# Altium PCB V7.PcbDoc
Units mil, origin at the board's own origin, x right, y up, seen from the top; angles counter-clockwise.
Board outline 1574.8 x 1968.5 mil, 2 copper layers (Top Layer, Bottom Layer), stack 12.8 mil thick; 85 components, 54 nets, 278 pads, 238 vias.
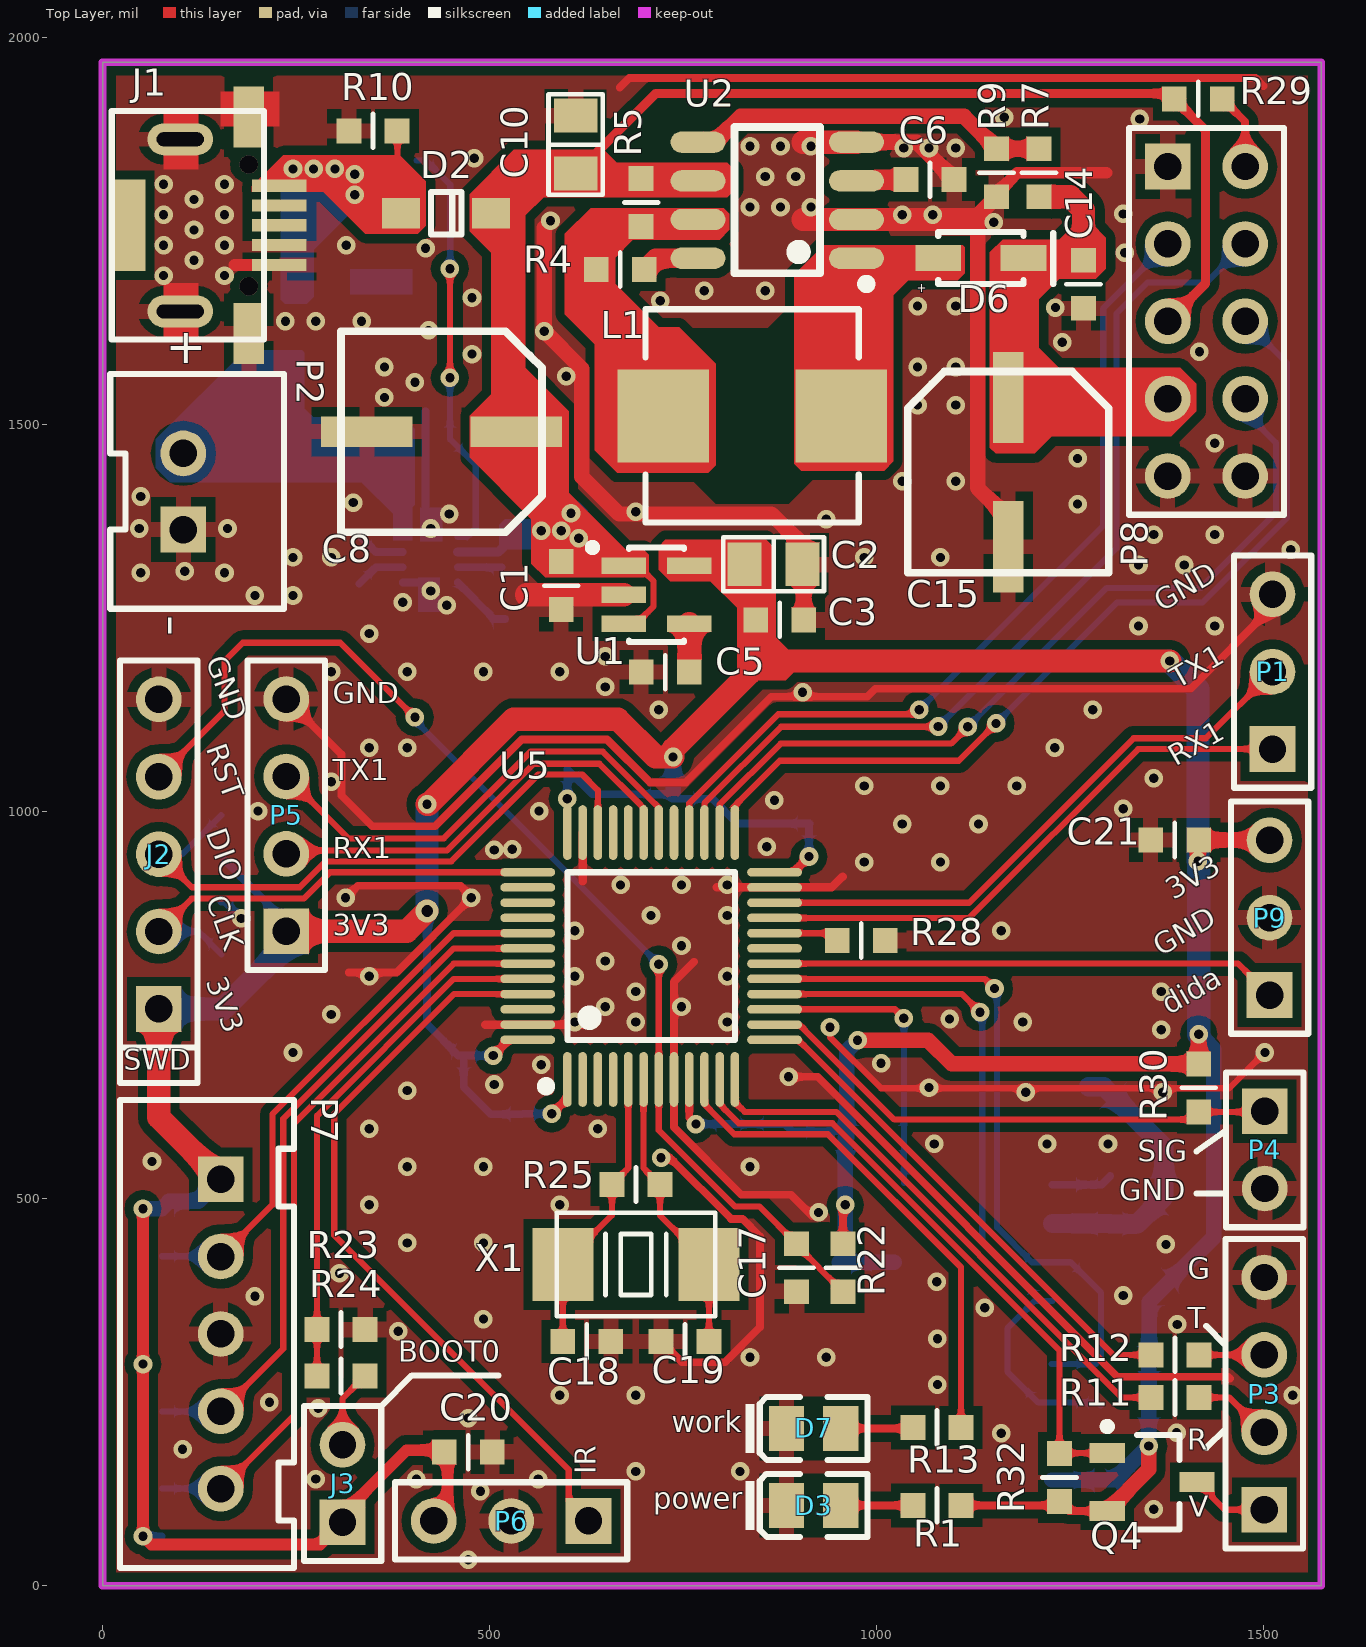
[diagram p0: Top Layer view]
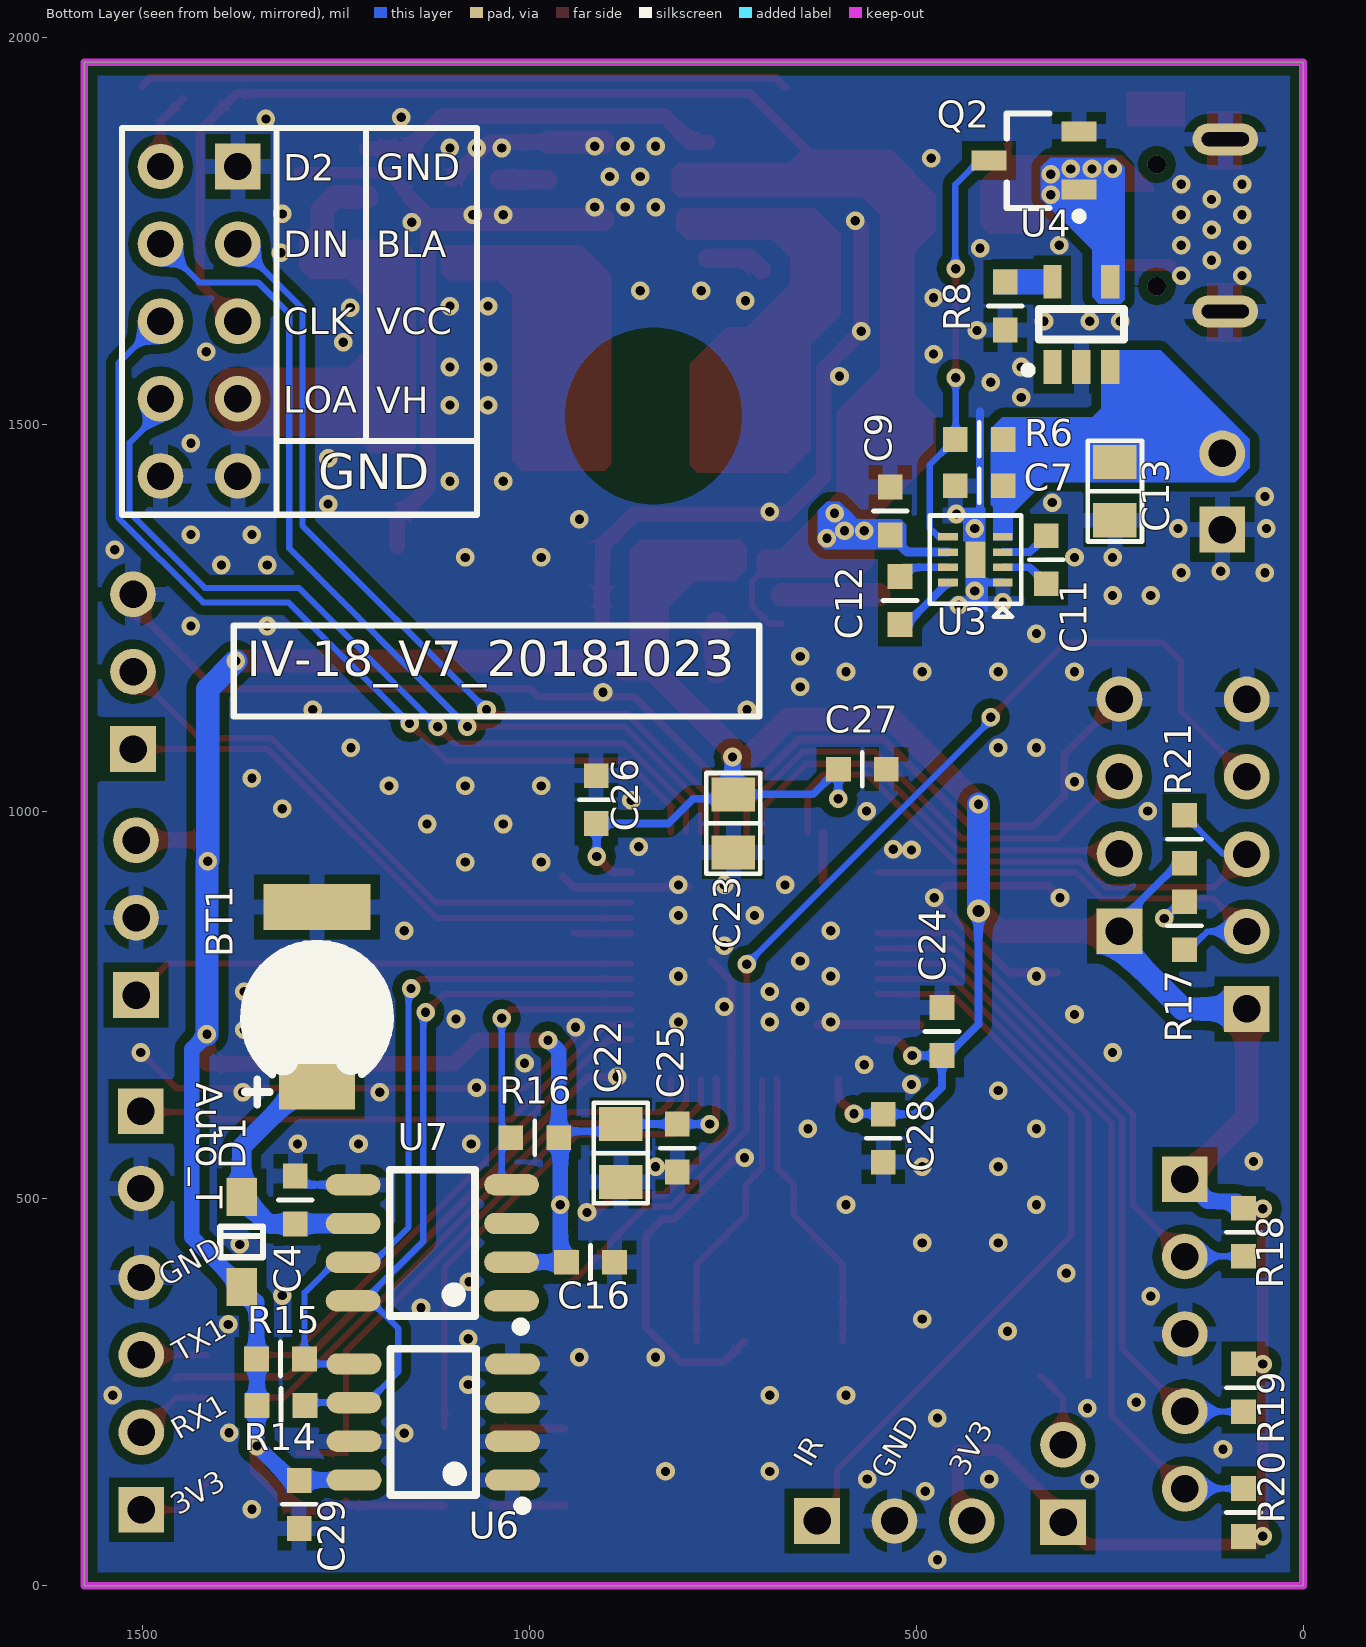
[diagram p1: Bottom Layer view, seen from below]

## Layer stack, top to bottom
Top Solder: solder mask 0.4, Solder Resist, Dk 3.5
Top Layer: signal copper 1.4
Dielectric1: core 10, FR-4, Dk 4.2
Bottom Layer: signal copper 1.4
Bottom Solder: solder mask 0.4, Solder Resist, Dk 3.5

## Board outline
0,0 0,1968.5 1574.8,1968.5 1574.8,0

## Design rules (kind name [scope] priority, off if disabled: settings)
Clearance Clearance_RF [InNet('NetC42_2')or InNet('NetC41_2')] p1: gap=7 ignorepadtopadclearanceinfootprint=FALSE
Clearance Clearance_Free [HasPad('Free-0') or HasPad('Free-1') or HasPad('Free-2') or HasPad('Free-3') or HasPad('Free-4') or HasPad('Free-5')] p2: gap=39.37 ignorepadtopadclearanceinfootprint=FALSE
Clearance Clearance_PWR [InNet('VDD5')] p3: gap=12 ignorepadtopadclearanceinfootprint=FALSE
Clearance Clearance_Poly [InPolygon] p4: gap=12 ignorepadtopadclearanceinfootprint=FALSE
Clearance [All] p5: gap=6 ignorepadtopadclearanceinfootprint=FALSE
ComponentClearance [All] p1 off: gap=3.94 collisioncheckmode=3 verticalgap=0 showdistances=FALSE
HoleSize [All] p1: absolutevalues=TRUE maxlimit=120 minlimit=1 maxpercent=80.000 minpercent=20.000
HoleToHoleClearance [All] p1 off: gap=10 allowstackedmicrovias=TRUE
MinimumSolderMaskSliver [All] p1 off: minsoldermaskwidth=10
PolygonConnect PolygonConnect_VIA [isvia] p1: connectstyle=Direct reliefconductorwidth=10 reliefentries=4 polygonreliefangle="90 Angle" airgapwidth=10
PolygonConnect PolygonConnect_Driect [InNet('AC-LP') Or InNet('NetR11_2') Or InNet('NetPT1_3') Or InNet('NetCT1_4') Or InNet('NetH2_1') Or InNet('AC-N') Or InNet('NetH3_1')] p2: connectstyle=Direct reliefconductorwidth=10 reliefentries=4 polygonreliefangle="90 Angle" airgapwidth=10
PolygonConnect PolygonConnect_TP [InComponent('TP19') Or InComponent('TP1') Or InComponent('TP2') Or InComponent('TP5') Or InComponent('TP20') Or InComponent('TP8')] p3: connectstyle=Direct reliefconductorwidth=10 reliefentries=4 polygonreliefangle="90 Angle" airgapwidth=10
PolygonConnect [All] p4: connectstyle=Relief reliefconductorwidth=20 reliefentries=4 polygonreliefangle="90 Angle" airgapwidth=12
RoutingVias [All] p1: holewidth=12 width=24 viastyle="Through Hole" minholewidth=12 minwidth=20 maxholewidth=130 maxwidth=250
SilkToSilkClearance [All] p1 off: silktosilkclearance=10
SilkToSolderMaskClearance SilkscreenOverComponentPads [IsPad] p1 off: minsilkscreentomaskgap=10 clearancetoexposedcopper=TRUE
SolderMaskExpansion [All] p1: expansion=4
UnRoutedNet [All] p1: checkbadconnections=TRUE
Width [All] p1: maxlimit=100 minlimit=6 preferedwidth=8
23 further rules are at their usual default settings.

## Components (designator, comment, footprint, x,y, rotation, side; value= is the part's Value field where it differs from the comment)
BT1 "超级电容" SF-3R3-S104Z 1274.13,735.24 r90 bottom
C1 "1uF" C1608(CC0603) 592.52,1292.32 r270 top value=100pF
C2 "10uF" C2012(CC0805) 867.13,1319.88 r0 top value=100pF
C3 "0.1uF" C1608(CC0603) 875,1248.03 r180 top value=100pF
C4 "0.1uf" C1608(CC0603) 1302.13,498.43 r270 bottom value=100pF
C5 "1nF" C1608(CC0603) 727.03,1180.54 r0 top value=100pF
C6 "560p" C1608(CC0603) 1069.17,1816.93 r0 top value=560pF
C7 "4.7uF/0805" C1608(CC0603) 418.31,1421.26 r0 bottom value=100pF
C8 "47uF/50V" 铝电解电容6.3 437.99,1491.14 r90 top
C9 "4.7uF" C1608(CC0603) 533.46,1388.78 r90 bottom value=100pF
C10 "10uF/25V_0805" C2012(CC0805) 611.22,1862.2 r270 top value=0.1uF
C11 "1uF" C1608(CC0603) 331.8,1325.79 r90 bottom value=100pF
C12 "1uF" C1608(CC0603) 520.67,1273.13 r270 bottom value=100pF
C13 "220uF/16V" C2012(CC0805) 243.11,1414.27 r90 bottom value=0.1uF
C14 "0.1u" C1608(CC0603) 1267.45,1681.6 r90 top value=0.1uF
C15 "47uF/50V" 铝电解电容6.3 1170.28,1438.98 r180 top
C16 "0.1uF" C1608(CC0603) 920.73,418.02 r0 bottom value=100pF
C17 "1nF" C1608(CC0603) 896.66,410.94 r270 top value=100nF
C18 "22pF 5%" C1608(CC0603) 625.69,315.61 r180 top
C19 "22pF 5%" C1608(CC0603) 752.66,315.61 r0 top
C20 "100nF" C1608(CC0603) 472.44,172.61 r0 top
C21 "100nF" C1608(CC0603) 1385.34,963.58 r180 top
C22 "4.7uF/25V/0805" C2012(CC0805) 881.58,558.96 r90 bottom
C23 "4.7uF/25V/0805" C2012(CC0805) 736.22,985.14 r90 bottom
C24 "100nF" C1608(CC0603) 466.54,716.04 r90 bottom
C25 "100nF" C1608(CC0603) 808.57,565.46 r270 bottom
C26 "100nF" C1608(CC0603) 913.39,1015.75 r90 bottom
C27 "100nF" C1608(CC0603) 569.39,1055.12 r180 bottom
C28 "100nF" C1608(CC0603) 542.32,578.25 r270 bottom
C29 "0.1uF" C1608(CC0603) 1297.12,105 r270 bottom value=100pF
D1 "DSS14" LC-SOD-123F 1371.59,444.14 r270 bottom
D2 "DSS14" LC-SOD-123F 443.9,1773.62 r180 top
D3 "红灯 0805" LC-0805_LED_S1 918.86,103.75 r0 top
D6 "BAT46W" INDM2716X11N 1135,1715.55 r180 top
D7 "红灯 0805" LC-0805_LED_S1 918.86,203.16 r0 top
J1 "USB_DC" USB_DC 205.71,1757.87 r0 top
J2 "SIP6E2P54" HDR1X5 72.68,745.31 r90 top
J3 "BOOT0_CH" HDR1X2 310.04,82.09 r90 top
L1 "330uh" INDM7070X40N 839.36,1511.64 r0 top value=330uH
P1 "预留串口" HDR1X3 1511.81,1081.1 r90 top
P2 "锂电池接口" XH2.54-2A 104.33,1364.72 r90 top
P3 "GPS串口" HDR1X4 1501.07,98.23 r90 top
P4 "倾斜开关" HDR1X2 1501.81,613.19 r270 top
P5 "Burn_Port" HDR1X4 237.2,845.67 r90 top
P6 "红外接口" HDR1X3 627.92,83.66 r180 top
P7 "按键接口" XH2.54-5A 152.65,525.29 r270 top
P8 "Header 5X2" HDR2X5 1376.38,1833.86 r270 top
P9 "滴答接口" HDR1X3 1507.96,763.22 r90 top
Q2 "AO3400" LC-SOT-23-3L 347.44,1841.54 r180 bottom
Q4 "AO3401A" LC-SOT-23-3L 1356.3,133.86 r180 top
R1 "1K" C1608(CC0603) 1078.24,103.75 r180 top
R4 "150ohm" C1608(CC0603) 668.98,1700.79 r0 top
R5 "1ohm" C1608(CC0603) 695.87,1787.4 r270 top
R6 "10K" C1608(CC0603) 418.31,1481.27 r0 bottom value=4.7K
R7 "33k" C1608(CC0603) 1209.92,1825.79 r270 top
R8 "1.3K" C1608(CC0603) 384.84,1653.54 r270 bottom value=1K
R9 "1k" C1608(CC0603) 1155.18,1825.79 r90 top value=1K
R10 "100K" C1608(CC0603) 349.41,1879.92 r0 top value=4.7K
R11 "22R" C1608(CC0603) 1385.83,243.11 r180 top
R12 "22R" C1608(CC0603) 1385.83,298.23 r180 top
R13 "1K" C1608(CC0603) 1078.24,204.34 r180 top
R14 "10k" C1608(CC0603) 1320.75,232.98 r180 bottom
R15 "10k" C1608(CC0603) 1321.23,292.99 r180 bottom
R16 "10k" C1608(CC0603) 992.62,578.74 r0 bottom
R17 "51K" C1608(CC0603) 153.24,852.65 r270 bottom
R18 "10k" C1608(CC0603) 76.86,456.68 r270 bottom
R19 "10k" C1608(CC0603) 76.86,255.89 r270 bottom
R20 "10k" C1608(CC0603) 76.86,94.48 r90 bottom
R21 "51K" C1608(CC0603) 153.24,964.66 r90 bottom
R22 "100R" C1608(CC0603) 956.67,410.94 r90 top value=100K
R23 "47K" C1608(CC0603) 308.07,331.04 r180 top
R24 "2.2K" C1608(CC0603) 308.07,271.03 r0 top
R25 "1M" C1608(CC0603) 689.17,518.37 r0 top
R28 "100R" C1608(CC0603) 980.32,833.66 r180 top value=10K
R29 "20ohm" C1608(CC0603) 1415.84,1921.26 r0 top value=1K
R30 "10k" C1608(CC0603) 1416.34,643.2 r270 top
R32 "100k" C1608(CC0603) 1236.63,139.76 r270 top value=1K
U1 "AME8861AEEV330Z" SOT23-5 755.71,1305.51 r270 top
U2 "MC33063A" LC-SOP-8_150mil 871.79,1790.35 r90 top
U3 "AW3632DNR" DFN_8L 423.34,1325.79 r0 bottom
U4 "LTC4054" LC-SOT-23-5 286.42,1629.92 r270 bottom
U5 "STM32F103C8T6" LC-LQFP-48_7x7x05P 708.86,813.65 r0 top locked
U6 "24CXX" LC-SOP-8_150mil 1123.9,211.55 r90 bottom
U7 "DS3231MZ+TRL" LC-SOIC-8_150mil 1125.05,443.02 r90 bottom
X1 "8MHz" XTAL-5032 689.17,415.02 r0 top

## Footprints (in the part's own frame and the unit in brackets; to place one, negate y for a bottom-side part, rotate by r counter-clockwise, add the part's x,y. Pads: shape width x height; smd on the part's side, far side on the other; paste and mask are expansions set on the pad)
C1608(CC0603) [mil]
  rect 32x32 smd: 1(-31,0) 2(31,0)
  silkscreen extent 0,-22 0,22
C2012(CC0805) [mil]
  rect 44x56 smd: 1(-37.5,0) 2(37.5,0)
  silkscreen extent -65,-35 65,35
DFN_8L [mm] "2X2mm"
  rect 0.65x0.25 smd: 1(-0.9,0.75) 2(-0.9,0.25) 3(-0.9,-0.25) 4(-0.9,-0.75) 5(0.9,-0.75) 6(0.9,-0.25) 7(0.9,0.25) 8(0.9,0.75)
  rect 0.65x1.2 smd: 9(0,0)
  silkscreen extent -1.5,-1.45 1.5,1.88
HDR1X2 [mm] "Connector; Header; 2 Position"
  rect 1.5x1.5 hole 0.9: 1(0,0)
  round 1.5 hole 0.9: 2(2.54,0)
  silkscreen extent -1.27,-1.27 3.81,1.27
HDR1X3 [mm] "Connector; Header; 3 Position"
  rect 1.5x1.5 hole 0.9: 1(0,0)
  round 1.5 hole 0.9: 2(2.54,0) 3(5.08,0)
  silkscreen extent -1.27,-1.27 6.35,1.27
HDR1X4 [mm] "Connector; Header; 4 Position"
  rect 1.5x1.5 hole 0.9: 1(0,0)
  round 1.5 hole 0.9: 2(2.54,0) 3(5.08,0) 4(7.62,0)
  silkscreen extent -1.27,-1.27 8.89,1.27
HDR1X5 [mm] "Connector; Header; 5 Position"
  rect 1.5x1.5 hole 0.9: 1(0,0)
  round 1.5 hole 0.9: 2(2.54,0) 3(5.08,0) 4(7.62,0) 5(10.16,0)
  silkscreen extent -1.27,-1.27 11.43,1.27
HDR2X5 [mm] "Connector; Header; 5x2 Position"
  rect 1.5x1.5 hole 0.9: 1(0,0)
  round 1.5 hole 0.9: 2(0,2.54) 3(2.54,0) 4(2.54,2.54) 5(5.08,0) 6(5.08,2.54) 7(7.62,0) 8(7.62,2.54) 9(10.16,0) 10(10.16,2.54)
  silkscreen extent -1.27,-1.27 11.43,3.81
INDM2716X11N [mm] "Molded Inductor, 2-Leads, Body 2.70x1.60mm, IPC Medium Density"
  rect 1.5x0.85 smd: 1(-1.397,0) 2(1.397,0)
  silkscreen extent -2.37,-0.85 1.4,0.85, body extent -1.4,-0.85 1.4,0.85, height 1.1
INDM7070X40N [mm] "Molded Inductor, 2-Leads, Body 7.00x7.00mm, IPC Medium Density"
  rect 3x3.05 smd: 1(-2.921,0) 2(2.921,0)
  silkscreen extent -3.5,-3.5 3.5,3.5, body extent -3.5,-3.5 3.5,3.5, height 4
LC-0805_LED_S1 [mm]
  rect 1.16x1.47 smd: A(0.89,0) K(-0.89,0)
  silkscreen extent -2.25,-1.04 1.77,1.03, body extent -1.01,-0.62 1.01,0.62, height 1.1
LC-LQFP-48_7x7x05P [mm]
  oval 0.28x1.8 smd mask+0.051: 1(-2.75,-4.05) 2(-2.25,-4.05) 3(-1.75,-4.05) 4(-1.25,-4.05) 5(-0.75,-4.05) 6(-0.25,-4.05) 7(0.25,-4.05) 8(0.75,-4.05) 9(1.25,-4.05) 10(1.75,-4.05) 11(2.25,-4.05) 12(2.75,-4.05) 25(2.75,4.05) 26(2.25,4.05) 27(1.75,4.05) 28(1.25,4.05) 29(0.75,4.05) 30(0.25,4.05) 31(-0.25,4.05) 32(-0.75,4.05) 33(-1.25,4.05) 34(-1.75,4.05) 35(-2.25,4.05) 36(-2.75,4.05)
  oval 1.8x0.28 smd mask+0.051: 13(4.05,-2.75) 14(4.05,-2.25) 15(4.05,-1.75) 16(4.05,-1.25) 17(4.05,-0.75) 18(4.05,-0.25) 19(4.05,0.25) 20(4.05,0.75) 21(4.05,1.25) 22(4.05,1.75) 23(4.05,2.25) 24(4.05,2.75) 37(-4.05,2.75) 38(-4.05,2.25) 39(-4.05,1.75) 40(-4.05,1.25) 41(-4.05,0.75) 42(-4.05,0.25) 43(-4.05,-0.25) 44(-4.05,-0.75) 45(-4.05,-1.25) 46(-4.05,-1.75) 47(-4.05,-2.25) 48(-4.05,-2.75)
  silkscreen extent -3.6,-4.42 2.75,2.75
LC-SOD-123F [mm]
  rect 1.25x1 smd: 1(1.475,0) 2(-1.475,0)
  silkscreen extent -0.5,-0.7 0.5,0.7, body extent -1.9,-0.85 1.85,0.85, height 1.2
LC-SOIC-8_150mil [mm]
  oval 0.7x1.8 smd: 1(-1.905,-2.6) 2(-0.635,-2.6) 3(0.635,-2.6) 4(1.905,-2.6) 5(1.905,2.6) 6(0.635,2.6) 7(-0.635,2.6) 8(-1.905,2.6)
  silkscreen extent -2.9,-3.05 2.4,1.4
LC-SOP-8_150mil [mm]
  oval 0.7x1.8 smd: 1(-1.905,-2.6) 2(-0.635,-2.6) 3(0.635,-2.6) 4(1.905,-2.6) 5(1.905,2.6) 6(0.635,2.6) 7(-0.635,2.6) 8(-1.905,2.6)
  silkscreen extent -2.9,-3.08 2.4,1.4, body extent -2.5,-3.1 2.5,3.1, height 1.75
LC-SOT-23-3L [mm] "http://www.aosmd.com/res/packaging_information/SOT-23-3L.pdf"
  rect 1.15x0.65 smd: 1(1.475,-0.95) 2(1.475,0.95) 3(-1.475,0)
  silkscreen extent -0.9,-1.95 1.6,1.55, body extent -0.9,-1.55 0.9,1.55, height 1.25
LC-SOT-23-5 [mm]
  rect 1.1x0.6 smd: 1(1.4,-0.95) 2(1.4,0) 3(1.4,0.95) 4(-1.4,0.95) 5(-1.4,-0.95)
  silkscreen extent -0.5,-1.88 1.62,1.4
SF-3R3-S104Z [mm]
  rect 1.5x2.5 smd: 1(-2.3,0)
  rect 1.5x3.5 smd: 2(3.6,0)
  silkscreen extent -2.89,-2.4 2.4,2.4
SOT23-5 [mm]
  rect 0.55x1.45 smd: 1(-0.315,-2.091) 2(0.635,-2.091) 3(1.585,-2.091) 4(1.585,0.059) 5(-0.315,0.059)
  silkscreen extent -1.04,-3.24 2.19,-0.12
USB_DC [mm]
  oval 2.15x1.05 hole 0.45 slot 1.55 at 0 deg: 0(-2.675,-2.825) 0(-2.675,2.825)
  rect 1.8x0.4 smd: 0(0.575,-1.3) 1(0.575,-0.65) 2(0.575,0) 3(0.575,0.65) 4(0.575,1.3)
  rect 1x3 smd: ""(-4.325,0)
  rect 1x2 smd: ""(-0.425,-3.55) ""(-0.425,3.55)
  silkscreen extent -4.92,-3.75 0.08,3.75
XH2.54-2A [mm]
  rect 1.5x1.5 hole 0.9: 1(0,0)
  round 1.5 hole 0.9: 2(2.5,0)
  silkscreen extent -2.6,-3.3 5.1,2.4
XH2.54-5A [mm]
  rect 1.5x1.5 hole 0.9: 1(0,0)
  round 1.5 hole 0.9: 2(2.54,0) 3(5.08,0) 4(7.62,0) 5(10.16,0)
  silkscreen extent -2.6,-3.3 12.76,2.4
XTAL-5032 [mm]
  rect 2x2.4 smd: 1(-2.4,0) 2(2.4,0)
  silkscreen extent -2.6,-1.7 2.6,1.7
铝电解电容6.3 [mm]
  rect 1x3 smd: 1(0,-2.45) 2(0,2.45)
  silkscreen extent -3.3,-3.3 3.3,3.3

## Part data
BT1: library part BATTERY, "Battery"
C1 C2: library part "Cap Pol2", "Polarized Capacitor (Axial)", LatestRevisionDate=17-Jul-2002, LatestRevisionNote="Re-released for DXP Platform.", PackageDescription="Polarized Capacitor; 2 Leads", PackageReference=POLAR0.8, Published=8-Jun-2000, Publisher="Altium Limited"
C3 C4 C5 C6 C7 C9 C10 C11 C12 C13 C14 C16 C17 C18 C19 C20 C21 C22 C23 C24 C25 C26 C27 C28 C29: library part Cap, "Capacitor", LatestRevisionDate=17-Jul-2002, LatestRevisionNote="Re-released for DXP Platform.", PackageReference=RAD-0.3, Published=8-Jun-2000, Publisher="Altium Limited"
  C3 C4 C5 C7 C9 C11 C12 C16 C29: PackageDescription="Radial Cap, Thru-Hole; 2 Leads; 0.3 in Pin Spacing"
  C6 C10 C13 C14: Created=1/08/1993, PackageDescription="Radial Cap, Thru-Hole; 2 Leads; 0.3 in Pin Spacing"
C8 C15: library part "Cap Pol1", "E型", LatestRevisionDate=17-Jul-2002, LatestRevisionNote="Re-released for DXP Platform.", PackageDescription="Polarized Capacitor (Radial); 2 Leads", PackageReference=RB7.6-15, Published=8-Jun-2000, Publisher="Altium Limited"
D1 D2: library part "SOD-123 B5819W  SL", "肖特基二极管", Package=SOD-123, SuppliersPartNumber=C8598, ComponentLink1Description=供应商, ComponentLink1URL=http://www.szlcsc.com/product/details_9093.html, Supplier=LC
D3 D7: library part "0805 红灯", "发光二极管", Package=0805, SuppliersPartNumber=C2295, ComponentLink1URL=http://www.szlcsc.com/product/details_2668.html, Supplier=LC
  D3: ComponentLink1Description=供应商
  D7: ComponentLink1Description=供应商链接
D6: library part "Diode 10TQ045", "Schottky Rectifier", ComponentLink1Description="Manufacturer Link", ComponentLink1URL=http://www.irf.com/, ComponentLink2Description=Datasheet, ComponentLink2URL=http://www.irf.com/product-info/datasheets/data/10tq.pdf, DatasheetVersion=PD-2.057B, LatestRevisionDate=17-Jul-2002, LatestRevisionNote="Re-released for DXP Platform.", Note="Terminal 2 is the TAB and is electrically connected to the cathode", PackageDescription="TO, Thru-Hole, Vertical, Heatsink Mounted; 3 In-Line Leads (1 Absent); Pitch 2.54 mm", PackageReference=TO-220AC, PackageVersion=Feb-1998, Published=8-Jun-2000, Publisher="Altium Limited"
J2 P7: library part "Header 5", "Header, 5-Pin", LatestRevisionDate=17-Jul-2002, LatestRevisionNote="Re-released for DXP Platform.", Publisher="Altium Limited"
J3 P2 P4: library part "Header 2", "Header, 2-Pin", LatestRevisionDate=17-Jul-2002, LatestRevisionNote="Re-released for DXP Platform.", Publisher="Altium Limited"
L1: library part "Inductor Iron", "7*7", LatestRevisionDate=17-Jul-2002, LatestRevisionNote="Re-released for DXP Platform.", PackageDescription="Axial Device, Thru-Hole; 2 Leads; 0.9 in Pin Spacing", PackageReference=AXIAL-0.9, Published=24-Mar-1999, Publisher="Altium Limited"
P1 P6 P9: library part "Header 3", "Header, 3-Pin", LatestRevisionDate=17-Jul-2002, LatestRevisionNote="Re-released for DXP Platform.", Publisher="Altium Limited"
P3 P5: library part "Header 4", "Header, 4-Pin", LatestRevisionDate=17-Jul-2002, LatestRevisionNote="Re-released for DXP Platform.", Publisher="Altium Limited"
P8: "Header, 5-Pin, Dual row", LatestRevisionDate=17-Jul-2002, LatestRevisionNote="Re-released for DXP Platform.", Publisher="Altium Limited"
Q2: library part "AO3400A N道沟 X0YV1T SOT-23", "MOS(场效应管)", Package=SOT-23, SuppliersPartNumber=C20917, ComponentLink1Description=供应商链接, ComponentLink1URL=http://www.szlcsc.com/product/details_21629.html, Supplier=LC
Q4: library part "AO3401A P道沟 X13A15 SOT-23", "MOS(场效应管)", Package=SOT-23, SuppliersPartNumber=C15127, ComponentLink1Description=供应商链接, ComponentLink1URL=http://www.szlcsc.com/product/details_15801.html, Supplier=LC
R1 R4 R5 R6 R7 R8 R9 R10 R13 R17 R21 R22 R23 R24 R25 R28 R29 R32: library part Res2, "Resistor", LatestRevisionDate=17-Jul-2002, LatestRevisionNote="Re-released for DXP Platform.", PackageReference=AXIAL-0.4, Published=8-Jun-2000, Publisher="Altium Limited"
  R4 R5 R7 R9 R29 R32: Created=1/08/1993, PackageDescription="Axial Device, Thru-Hole; 2 Leads; 0.4 in Pin Spacing"
  R6 R8 R10: PackageDescription="Axial Device, Thru-Hole; 2 Leads; 0.4 in Pin Spacing"
R11 R12 R14 R15 R16 R18 R19 R20 R30: library part RES5
U1: library part MIC5205-3.3BM5, "MIC5205-3.3BM5"
U2: library part MC330
U5: "STM32 ARM-based 32-bit MCU with 64 Kbytes Flash, 48-pin LQFP, Industrial Temperature"
X1: library part XTAL, "Crystal Oscillator", LatestRevisionDate=17-Jul-2002, LatestRevisionNote="Re-released for DXP Platform.", PackageReference=R38, Published=8-Jun-2000, Publisher="Altium Limited"

## Via types
v1: diameter 24, hole 12, Top Layer to Bottom Layer, tented both sides, 235 vias
v2: diameter 23.62, hole 23.62, Top Layer to Bottom Layer, 2 vias
v3: diameter 30, hole 15, Top Layer to Bottom Layer, tented both sides, 1 vias

## Nets (pads, with @x,y where several pads share a name; then routed paths per layer and width w, separated by ;. In a path a pad name is that pad's centre, name@x,y a point inside that pad or via, vN(x,y) a via of type N, cw(c..) or ccw(c..) an arc to the next point about the centre after c; other vN are vias at no path point)
5Vin: D2.1 J1.4 Q2.1 R10.2 U4.4 | length 69.4
  Top Layer w8: 380.91,1810.04 R10.2@380.91,1879.43
  other v1: 325.79,1797.24 325.79,1823.82 246.06,1830.71 272.64,1830.71 300.2,1830.71
Auto_T: P4.1 R30.2 U5.14 | length 687.4
  Top Layer w8: U5.14 900.48,725.06 1023.18,602.36 1406.5,602.36 R30.2 P4.1@1500.83,612.2
BLANK: P8.3 U5.28 | length 1120.1
  Top Layer w8: U5.28 758.07,1011.02 873.03,1125.98 1049.21,1125.98 v1(1055.12,1131.89)
  Bottom Layer w8: v1(1055.12,1131.89) 1293.04,1369.81 1293.04,1650.52 P8.3
BOOT0: R23.2 R24.1 U5.44 | length 681.9
  Top Layer w8: R24.1 R23.2 277.07,607.41 453.78,784.12 U5.44
CLK: P8.6 U5.25 | length 1178.5
  Top Layer w8: U5.25 817.13,1007.98 875.09,1065.94 1106.3,1065.94 v1(1154.53,1114.17)
  Bottom Layer w8: v1(1154.53,1114.17) 1311.02,1270.67 1421.37,1270.67 1530.24,1379.53 1530.24,1580 P8.6
D2: P8.2 R29.2 | length 99.6
  Top Layer w10: R29.2 1476.38,1891.72 P8.2
dida: P9.1 U5.18 | length 656.5
  Top Layer w8: U5.18 1467.38,803.8 P9.1
DIN: P8.4 U5.27 | length 1213.3
  Top Layer w8: U5.27 777.76,1010.91 876.74,1109.89 v1@1079.72,1109.89
  Bottom Layer w8: v1(1079.72,1110.24) 1310.04,1340.55 1310.04,1643.71 1350.39,1684.06 1426.57,1684.06 P8.4
GND: BT1.2 C1.2 C2.2 C3.1 C4.1 C5.1 C6.2 C7.2 C8.2 C9.2 C10.1 C13.1 C14.1 C15.2 C16.1 C17.2 C18.1 C19.1 C20.2 C21.2 C22.1 C23.1 C24.2 C25.2 C26.2 C27.2 C28.2 C29.2 D3.K D7.K J1.0 J1.1 J1.@188.98,1618.11 J1.@188.98,1897.64 J2.5 P1.3 P2.1 P3.4 P4.2 P5.4 P6.2 P7.3 P8.1 P8.9 P8.10 P9.2 Q2.2 R8.2 R9.1 R10.1 R17.1 R23.1 R28.1 U1.2 U2.2 U2.4 U3.1 U3.9 U4.2 U5.8 U5.23 U5.35 U5.47 U6.1 U6.2 U6.3 U6.4 U6.7 U7.5 | length 7722.4
  Top Layer w8: v1(939.96,721.46) 939.96,708.66 1005.91,642.72 1455.71,642.72 v1(1501.97,688.98)
  Top Layer w10: P5.4 308.56,1074.31 308.56,1021.16 348.43,981.3 429.49,981.3 541.69,1093.5 651.79,1093.5 707.29,1038 753.55,1038 864.17,1148.62 988.19,1148.62 998.61,1159.04 1406.09,1159.04 1511.81,1264.76 P1.3 ; v1(313.98,888.78) 329.72,904.53 462.6,904.53 476.38,890.75 v1(476.38,888.78) 379.92,792.32 317.91,792.32 ; 668.31,1936.02 680.54,1948.26 1489.73,1948.26 1500,1937.99 ; C19.1 748.66,288.61 804.22,288.61 849.41,333.81 849.41,451.45 826.92,473.94 812.16,473.94 732.95,553.15 v1(721.66,553.15) ; 764.22,806.1 738.39,780.27 U5.8 738.39,592.28 825.5,505.16 889.53,505.16 v1@917.32,477.36 ; v1(886.42,657.48) 924,657.48 1311.37,270.11 1454.3,270.11 1456.69,267.72 ; C3.1 C3.1@908.64,1248.03
  Top Layer w11: 494.42,725.06 U5.47 626.97,725.06 ; 620.28,910.52 U5.35 ; 793.64,902.23 U5.23 942.09,902.23 956.2,916.34
  Top Layer w15: R9.1 1155.18,1798.88 1182.09,1825.79 1297.24,1825.79
  Top Layer w15.75: 170.6,1706.69 J1.0@228.35,1706.69
  Top Layer w19.68: C3.1 C2.2@906,1318.51
  Top Layer w20: v1(578.74,1763.78) 578.74,1762.8 570.87,1754.92 v1(570.87,1620.94) 619.09,1572.71 619.09,1433.07 667.32,1384.84 864.17,1384.84 904.63,1344.39 C2.2 ; U2.4 1051.75,1865.35 C6.2 ; 1125.75,1765.35 1130.65,1770.26 ; R9.1 1130.65,1770.26 ; C15.2 1170.28,1378.94 1130.65,1418.56 1130.65,1770.26
  Top Layer w30: 547.87,1280.51 U1.2 ; 904.92,1765.35 U2.2 1125.75,1765.35 ; v1@904.92,1865.35 U2.4
  Bottom Layer w10: R17.1 157.69,883.65 v1(179.13,862.2) ; U3.1 v1@423.23,1296.26 ; 417.32,1517.5 417.32,1373.03 v1(424.21,1366.14) ; U7.5 1290.72,518.02 C4.1
  other v1: 472.44,33.66 1358.27,98.59 488.19,122.05 275.59,137.8 405.51,137.8 562.99,137.8 688.98,147.64 823.78,147.64 103.35,176.34 1161.42,196.85 1387.8,197.79 472.44,216.54 278.54,229.33 215.55,237.2 590.55,246.06 688.98,246.06 1538.09,246.06 1078.74,259.84 836.61,295.28 935.04,295.28 1078.74,318.9 381.89,328.74 1388.86,337.6 492.13,344.49 1139.76,359.04 196.85,374.02 1318.9,375 1077.76,392.72 306.1,403.54 1374.02,440.94 393.7,442.91 492.13,442.91 925.2,482.28 344.49,492.13 590.55,492.13 393.7,541.34 492.13,541.34 836.61,541.34 63.87,548.23 1074.8,570.87 1220.47,570.87 1299.21,570.87 344.49,590.55 639.76,590.55 1192.91,637.8 1370.08,637.8 393.7,639.76 1067.91,643.7 505.91,647.64 566.93,673.23 1005.91,675.24 246.06,688.98 1368.11,718.5 610.24,728.35 688.98,728.35 807.09,728.35 1188.98,728.35 1094.49,732.28 295.28,738.19 649.61,748.03 748.03,748.03 688.98,767.72 1368.11,767.72 344.49,787.4 610.24,787.4 807.09,787.4 649.61,807.09 748.03,826.77 610.24,846.46 1161.42,846.46 708.66,866.14 807.09,866.14 669.29,905.51 748.03,905.51 807.09,905.51 984.25,935.04 1082.68,935.04 505.91,950.79 529.38,951.77 858.27,954.72 1033.46,984.25 1131.89,984.25 200.79,1000.98 563.98,1000.98 1318.9,1003.94 868.11,1014.76 984.25,1033.46 1082.68,1033.46 1181.1,1033.46 295.28,1038.95 1358.27,1043.31 344.49,1082.68 393.7,1082.68 1230.32,1082.68 718.5,1131.89 1279.53,1131.89 904.53,1154.53 649.61,1161.42 295.28,1181.1 393.7,1181.1 492.13,1181.1 590.55,1181.1 649.61,1200.79 344.49,1230.32 1338.58,1240.16 1437.01,1240.16 444.88,1266.79 387.8,1270.67 196.85,1279.53 246.06,1279.53 424.21,1285.43 49.21,1309.06 157.48,1309.06 106.3,1311.02 1338.58,1318.9 1397.64,1318.9 246.06,1328.74 295.28,1328.74 984.25,1328.74 1082.68,1328.74 1535.43,1338.58 1358.27,1358.27 1437.01,1358.27 47.24,1366.14 161.42,1366.14 935.04,1377.95 447.83,1384.84 688.98,1387.8 1259.84,1397.64 324.01,1399.61 49.21,1407.48 1033.46,1427.17 1102.36,1427.17 1259.84,1456.69 1437.01,1476.38 1053.15,1525.59 1102.36,1525.59 364.17,1535.43 403.54,1555.12 598.96,1562.99 364.17,1574.8 1053.15,1574.8 1102.36,1574.8 477.36,1591.54 1417.32,1594.49 1240.16,1606.67 421.26,1622.05 236.22,1633.86 275.59,1633.86 334.65,1633.86 1231.3,1651.57 1053.15,1653.54 1102.36,1653.54 720.47,1660.43 477.36,1664.37 777.56,1673.23 856.3,1673.23 78.74,1692.91 157.48,1692.91 118.11,1712.6 1320.78,1722.44 417.32,1728.35 78.74,1732.28 157.48,1732.28 314.96,1732.28 118.11,1751.97 1151.57,1761.81 78.74,1771.65 157.48,1771.65 1033.46,1771.65 1072.83,1771.65 1318.9,1772.64 836.61,1781.5 875.98,1781.5 915.35,1781.5 118.11,1791.34 78.74,1811.02 157.48,1811.02 856.3,1820.87 895.67,1820.87 480.32,1844.7 1035.43,1857.78 1067.91,1857.78 1102.36,1857.78 836.61,1860.24 875.98,1860.24 915.35,1860.24 1340.1,1895.28 1165.18,1897.64
GPS_EN: Q4.1 R32.1 U5.11 | length 796.3
  Top Layer w8: U5.11 797.44,622.02 822.02,597.44 943.03,597.44 1236.63,303.84 R32.1 ; R32.1@1238.19,171.26 Q4.1
IR: P6.1 U5.45 | length 976.5
  Top Layer w8: U5.45 453.9,764.43 299.21,609.75 299.21,452.76 602.35,149.62 602.35,109.24 P6.1
KEY1: P7.2 R18.2 U5.41 | length 713.8
  Top Layer w8: P7.2 219.49,492.13 219.49,609.22 453.44,843.17 U5.41
  Bottom Layer w8: R18.2 P7.2@152.26,425.68
KEY2: P7.4 R19.2 U5.42 | length 894.1
  Top Layer w8: P7.4 233.49,306.13 233.49,603.42 453.56,823.49 U5.42
  Bottom Layer w8: R19.2 P7.4@152.26,224.89
KEY3: P7.5 R20.2 U5.43 | length 974.5
  Top Layer w8: P7.5 247.49,220.13 247.49,597.62 453.67,803.8 U5.43
  Bottom Layer w8: R20.2 P7.5@152.45,125.48
LOAD: P8.8 U5.26 | length 1075.3
  Top Layer w8: U5.26 797.44,1009.51 876.17,1088.24 1096.46,1088.24 v1(1118.11,1109.89)
  Bottom Layer w8: v1(1118.11,1109.89) 1297.59,1289.37 1419.18,1289.37 1516.24,1386.43 1516.24,1476.87 1476.38,1516.73 P8.8
NetC5_2: C5.2 U1.4 | length 62.6
  Top Layer w30: C5.2 U1.4
NetC6_1: C6.1 U2.3 | length 62.4
  Top Layer w25: U2.3@975.72,1816.93 C6.1
NetC11_1: C11.1 U3.2 | length 64.9
  Bottom Layer w10: C11.1 352.96,1315.94 U3.2
NetC11_2: C11.2 U3.3 | length 64.9
  Bottom Layer w10: C11.2 352.96,1335.63 U3.3
NetC12_1: C12.1 U3.7 | length 56.7
  Bottom Layer w10: U3.7 C12.1@515.48,1315.94
NetC12_2: C12.2 U3.8 | length 81.2
  Bottom Layer w10: U3.8 506.01,1249.02 C12.2@520.4,1249.02
NetC18_2: C18.2 R25.1 U5.5 X1.1 | length 373.6
  Top Layer w8: C18.2 X1.1 658.17,478.51 R25.1 679.33,539.53 U5.5
NetC19_2: C19.2 R25.2 U5.6 X1.2 | length 373.6
  Top Layer w8: U5.6 699.02,539.53 R25.2 720.17,478.51 X1.2 C19.2
NetD3_A: D3.A R1.2 | length 93.3
  Top Layer w10: D3.A R1.2
NetD6_2: D6.2 L1.2 U2.1 | length 105.7
  Top Layer w30: U2.1 D6.2@1079.8,1715.35
NetD7_A: D7.A R13.2 | length 92.2
  Top Layer w10: D7.A R13.2@1046.06,203.16
NetJ3_2: J3.2 R24.2 | length 101
  Top Layer w8: J3.2 310.04,242 R24.2
NetL1_1: L1.1 R4.1 R5.2 U2.7 | length 77.3
  Top Layer w25: R5.2 704.82,1765.35 U2.7
NetP3_1: P3.1 Q4.3 | length 101.5
  Top Layer w8: Q4.3 1450,98.23 P3.1
NetP3_2: P3.2 R11.1 | length 102.8
  Top Layer w8: R11.1 1456.19,243.11 P3.2
NetP3_3: P3.3 R12.1 | length 84.2
  Top Layer w8: R12.1 P3.3
NetR4_2: R4.2 U2.8 | length 75.5
  Top Layer w25: R4.2 714.55,1715.35 U2.8
NetR7_1: R7.1 R9.2 U2.5 | length 471.6
  Top Layer w20: U2.5 791.04,1865.35 824.31,1898.62 1113.35,1898.62 R9.2 R7.1
NetR8_1: R8.1 U4.5
NetR13_1: R13.1 U5.10 | length 658
  Top Layer w8: U5.10 777.76,621.91 816.23,583.44 937.23,583.44 1109.24,411.43 R13.1
NetR28_2: R28.2 U5.20 | length 74.1
  Top Layer w8: U5.20 R28.2@942.46,843.17
NRST: C17.1 J2.4 R22.1 U5.7 | length 1469.3
  Top Layer w8: J2.4 157.48,1130.12 157.48,1194.78 181.21,1218.5 307.09,1218.5 v1(403.54,1122.05) ; v1(718.7,803.15) U5.7 718.7,588.61 817.16,490.16 848.45,490.16 C17.1 ; C17.1@895.67,440.94 R22.1
  Bottom Layer w8: v1(403.54,1122.05) 403.54,1118.11 v1@718.5,803.15
RTC_RST: R16.2 U5.15 U7.4 | length 384.5
  Top Layer w8: U5.15 1023.95,744.75 v1(1035.43,733.27)
  Bottom Layer w8: U7.4@1035.43,520.67 v1(1035.43,733.27)
RTC_SCL: R14.2 U5.16 U6.6 U7.8 | length 938.8
  Top Layer w8: U5.16 1110.57,764.43 v1(1133.86,741.14)
  Bottom Layer w8: v1@1136.81,732.28 1136.81,444.75 U7.8@1213.55,368.02 ; U7.8 U7.8@1213.55,368.02 ; R14.2 1286.17,236.55 U6.6 1209.19,236.55 1169.17,276.57 1169.17,332.5 1204.69,368.02 U7.8@1213.55,368.02
RTC_SDA: R15.2 U5.17 U6.5 U7.7 | length 911.8
  Top Layer w8: U5.17 1140.09,784.12 v1(1152.56,771.65)
  Bottom Layer w8: v1@1152.65,771.65 1155.86,768.45 1155.86,463.11 1200.95,418.02 U7.7 1250.84,418.02 1290.23,378.62 R15.2 ; U6.5 R15.2@1283.8,286.55
RX1: P5.2 U5.31 | length 566
  Top Layer w8: P5.2 241.45,949.91 444.88,949.91 557.19,1062.23 642.06,1062.23 694.84,1009.44 694.84,1009.22 698.62,1005.45 698.84,1005.45 699.02,1005.27 U5.31
RX2: R12.2 U5.13 | length 655.2
  Top Layer w8: U5.13 898.84,705.38 1305.99,298.23 R12.2
RX3: P1.2 U5.22 | length 767.2
  Top Layer w8: U5.22 1119.75,882.54 1332.31,1095.1 1425.81,1095.1 P1.2
SWCLK: J2.2 R17.2 U5.37 | length 601.6
  Top Layer w8: J2.2 115.16,887.8 259.84,887.8 293.96,921.91 U5.37
  Bottom Layer w8: J2.2 123.98,845.31 R17.2@153.54,815.75
SWDIO: J2.3 R21.2 U5.34 | length 810
  Top Layer w8: J2.3 115.43,902.56 254.81,902.56 288.16,935.91 450.68,935.91 562.99,1048.23 619.72,1048.23 639.96,1027.99 U5.34
  Bottom Layer w8: J2.3 102.89,945.31 R21.2
TX1: P5.3 U5.30 | length 623.6
  Top Layer w8: P5.3 317.32,965.55 440.72,965.55 552.92,1077.76 646.33,1077.76 713.49,1010.59 713.82,1010.59 718.7,1005.71 U5.30
TX2: R11.2 U5.12 | length 725.2
  Top Layer w8: U5.12 817.13,624.8 829.72,612.2 948.06,612.2 1317.16,243.11 R11.2
TX3: P1.1 U5.21 | length 733.9
  Top Layer w8: U5.21 1119.87,862.86 1338.11,1081.1 P1.1
VBAT: BT1.1 C4.2 D1.2 U7.6 | length 353.2
  Bottom Layer w25: U7.6 1301.54,468.02 C4.2 1336.8,467.43 D1.2 1371.59,566.85 1293.75,644.69 BT1.1
VBAT_li: C7.1 C13.2 P2.2 R6.1 U3.4 U4.3
VCC3.3V: C2.1 C3.2 C16.2 C20.1 C21.1 C22.2 C23.2 C24.1 C25.1 C26.1 C27.1 C28.1 C29.1 D1.1 J2.1 J3.1 P5.1 P6.3 P7.1 P9.3 Q4.2 R1.1 R14.1 R15.1 R16.1 R18.1 R19.1 R20.1 R21.1 R22.2 R30.1 R32.2 U1.5 U5.1 U5.9 U5.24 U5.36 U5.48 U6.8 U7.2 | length 6933.3
  Top Layer w10: v1(504.92,685.04) 525.26,705.38 U5.48 ; v1(580.25,609.71) 600.59,630.05 U5.1 ; U5.9 758.07,605.12 v1(766.73,596.46) ; U5.24 892.46,921.91 v1(912.8,942.25) ; R22.2 956.67,489.15 v1(959.65,492.13) ; R1.1 1231.62,103.75 R32.2 1248.94,96.46 Q4.2
  Top Layer w15: v1(52.17,487.19) v1(52.17,286.4) v1(52.17,63.98) 62.99,53.15 281.1,53.15 J3.1 310.04,92.52 392.72,175.2 445.87,175.2 445.87,101.6 P6.3
  Top Layer w19.68: Q4.2 1351.75,149.97 v1(1351.75,180.49)
  Top Layer w20: v1(975.62,704.72) 1066.93,704.72 1097.45,674.2 R30.1 v1(1416.34,712.6) ; v1(1415.42,936.07) 1415.42,962.53 1415.35,962.6 C21.1 P9.3@1507.6,963.58
  Top Layer w30: J2.1 72.68,605.26 P7.1 ; P5.1 393.07,845.67 v3(419.29,871.89) ; v1(419.29,1009.84) 421.26,1009.84 530.92,1119.5 665.93,1119.5 714.57,1070.87 v1(737.2,1070.87) 737.2,1080.71 835.63,1179.13 ; 862.2,1185.04 872.05,1194.88 v1(1378.94,1194.88)
  Bottom Layer w10: v1(52.17,63.98) R20.1@76.37,63.98 ; R21.1@157.18,937.6 P5.1@241.14,853.64 ; v3(419.29,871.89) 419.29,725.39 459.65,685.04 C24.1 ; v1(504.92,685.04) C24.1 ; v1(580.25,609.71) 542.78,609.71 C28.1 501.43,609.25 466.54,644.14 C24.1 ; C27.1 C27.1@600.59,1054.92 ; v1(600.59,1016.73) C27.1@600.59,1054.92 ; C23.2@736.22,1016.73 788.12,1016.73 820.1,984.75 C26.1 ; C23.2 632.87,1022.64 C27.1@600.59,1054.92 ; v1(766.73,596.46) C25.1 C22.2 890.94,587.09 953.27,587.09 R16.1 ; v1(912.8,942.25) C26.1@912.8,984.16
  Bottom Layer w20: v1(52.17,487.19) R18.1@76.37,487.19 ; R18.1 85.73,496.55 123.91,496.55 P7.1 ; C23.2 737.2,1023.62 v1(737.2,1070.87) ; C16.2 U7.2 ; C16.2@959.65,427.8 R16.1@959.65,578.64 ; R16.1 961.62,690.73 v1(975.62,704.72) ; U6.8 1307.81,136.55 v1(1351.75,180.49) R14.1 1351.75,292.5 R15.1 1352.23,366.72 D1.1 1435.81,450.29 1435.81,693.13 v1(1416.34,712.6)
  Bottom Layer w30: J2.1 155.75,745.31 237.2,826.77 P5.1 ; v3(419.29,871.89) v1(419.29,1009.84) ; v1(1378.94,1194.88) 1415.42,1158.4 v1(1415.42,936.07) ; v1(1416.34,712.6) v1@1416.34,936.07
VCC5V: C1.1 C8.1 C9.1 C10.2 D2.2 P8.5 R5.1 R29.1 U1.1 U1.3 U2.6 U3.6 | length 1354.6
  Top Layer w8: U1.3 689.49,1243.11 711.93,1265.54 711.93,1297.92 691.93,1317.91 U1.1
  Top Layer w12: C10.2 714.67,1928.15 1377.95,1928.15 R29.1 1425.2,1880.91 1425.2,1682.68 P8.5
  Bottom Layer w12: U3.6 511.32,1335.63 C9.1
  other v1: 615.16,1353.35 566.93,1363.19 592.52,1363.19 605.32,1385.83
VCC35V: C14.2 C15.1 D6.1 P8.7 R7.2 | length 204.3
  Top Layer w30: D6.1 C14.2@1264.5,1715.55 ; R7.2 1250.49,1794.79 1267.45,1777.83 C14.2
VH_EN: Q2.3 R6.2 U3.5 | length 548.5
  Top Layer w8: v1(448.82,1561.02) v1(448.82,1701.77)
  Bottom Layer w8: Q2.3 418.31,1841.54 449.31,1810.54 v1@449.31,1695.87 ; v1(448.82,1561.02) 448.82,1481.76 R6.2 482.28,1448.29 482.28,1366.69 470.91,1355.32 U3.5
pads on no net: J1.2 J1.3 J1.@35.43,1757.87 U4.1 U5.2 U5.3 U5.4 U5.19 U5.29 U5.32 U5.33 U5.38 U5.39 U5.40 U5.46 U7.1 U7.3
copper on no net:
  other v2: 188.98,1679.13 188.98,1836.61

## Polygon pours and split planes (outlines as drawn)
GND on Bottom Layer "Bottom Layer-GND" (solid, remove dead copper, pour order 0): 0,0 1574.8,0 1574.8,1968.5 0,1968.5
GND on Top Layer "Bottom Layer-GND" (solid, remove dead copper, pour order 2): 0,0 1574.8,0 1574.8,1968.5 0,1968.5

## Keep-outs
Keep-Out Layer:
  the board outline again, w10

## Other copper
Top Layer:
  region net GND: 228.35,1885.83 228.35,1931.1 152.56,1931.1 152.56,1885.83
  rectangle net GND: 78.74,1829.72 124.02,1905.51
  rectangle net GND: 78.74,1607.28 124.02,1683.07
  region net 5Vin: 192.91,1801.18 285.43,1801.18 339.57,1747.05 406.93,1747.05 417.32,1757.44 417.32,1814.96 383.86,1848.43 233.27,1848.43 192.91,1808.07
  region net VCC5V: 474.41,1750.24 502.35,1722.29 502.35,1539.76 474.41,1511.81 474.41,1457.99 554.13,1378.27 554.13,1320.87 571.85,1303.15 699.8,1303.15 705.71,1309.06 705.71,1331.89 699.02,1338.58 676.18,1338.58 602.36,1412.4 602.36,1517.66 546.26,1573.76 546.26,1770.81 569.74,1794.29 664.37,1794.29 807.09,1794.29 815.95,1803.15 815.94,1829.72 807.09,1838.58 664.37,1838.58 647.64,1855.32 531.5,1855.32 474.41,1798.23
  region net NetL1_1: 630.47,1780.08 597.44,1747.05 597.44,1642.72 635.83,1604.33 635.83,1467.52 665.35,1437.99 782.48,1437.99 792.32,1447.83 792.32,1578.74 745.08,1625.98 718.5,1625.98 662.4,1682.09 662.4,1716.21 685.37,1739.17 797.24,1739.17 810.04,1751.97 810.04,1772.64 802.6,1780.08
  region net VCC35V: 1256.89,1759.84 1236.22,1739.17 1163.06,1739.17 1146.65,1722.77 1146.65,1470.47 1153.98,1463.15 1204.29,1463.15 1226.38,1485.24 1380.91,1485.24 1413.39,1517.72 1413.39,1553.15 1392.72,1573.82 1235.24,1573.82 1209.65,1599.41 1209.65,1662.4 1236.22,1688.98 1283.46,1688.98 1296.26,1701.77 1296.26,1742.13 1278.54,1759.84
  region net NetD6_2: 956.69,1732.28 932.09,1732.28 893.7,1693.9 893.7,1449.8 902.56,1440.94 1009.84,1440.94 1021.65,1452.76 1021.65,1667.32 1041.34,1687.01 1104.99,1687.01 1114.17,1696.19 1114.17,1729.33 1111.22,1732.28
  region net VCC3.3V: 857.28,1351.38 870.08,1338.58 870.08,1225.39 897.64,1197.83 897.64,1185.04 882.86,1170.26 822.85,1170.26 819.88,1173.23 819.88,1263.78 785.43,1298.23 733.46,1298.23 718.7,1312.99 718.7,1342.72 727.36,1351.38
  pour cut-out: 646.06,355.78 734.78,355.78 743.17,364.17 733.33,374.02 641.86,374.02
  pour cut-out: 764.01,1425.72 792.12,1397.6 886.63,1397.6 953.4,1464.38 953.4,1565.94 893.66,1625.68 756.59,1625.68 725.53,1594.63 725.53,1464.19 792.3,1397.43 793.01,1397.43
  pour cut-out: 856.1,1622.33 887.8,1654.02 887.8,1619.87 885.05,1617.13
Bottom Layer:
  rectangle net VBAT_li: 375,1350.39 400.59,1421.26
  rectangle net GND: 410.43,1349.06 439.31,1393.26
  rectangle net NetR8_1: 319.88,1668.31 400.59,1701.56
  region net GND: 436.24,1302.52 407.37,1302.52 407.37,1258.32 436.24,1258.32
  pour cut-out: 839.36,1397.6 cw(c839.36,1511.64) 725.32,1511.64 cw(c839.36,1511.64) 839.36,1625.68 cw(c839.36,1511.64) 953.4,1511.64 cw(c839.36,1511.64)
  region: 375,1350.39
  region net VBAT_li: 184.06,1596.46 257.87,1596.46 260.83,1593.5 260.83,1521.17 272.38,1509.84 388.78,1509.84 403.54,1495.08 403.54,1396.5 388.94,1381.89 378.57,1381.89 334.28,1426.18 87.6,1426.18 68.9,1444.88 68.9,1481.3
  region net 5Vin: 230.31,1661.42 235.24,1656.5 263.78,1656.5 272.64,1665.35 272.64,1726.38 338.58,1792.32 338.58,1833.66 326.77,1845.47 243.11,1845.47 230.31,1832.68
  region net VCC5V: 582.68,1384.84 598.43,1400.59 615.16,1400.59 626.97,1388.78 626.97,1387.43 626.97,1347.69 618.84,1339.57 517.72,1339.57 512.8,1344.49 512.8,1371.06 519.69,1377.95 575.79,1377.95

## Silkscreen, mask and mechanical layers (free items; w line width, h text height)
Top Overlay:
  lines w7.87: 22.68,695.31 22.68,649.65 122.68,649.65 122.68,695.31 ; 360.04,232.09 399.61,271.65 511.81,271.65 ; 1413.36,561.17 1451.81,588.19 ; 1413.46,506.89 1451.81,506.89 ; 1426.18,335.63 1450.93,310.88 ; 1426.32,178.01 1451.07,202.76
  text "+" at 81.69,1563.98 h78.74
  text "GND" at 1373.19,1250.02 h47.24 r30
  text "-" at 125.98,1226.38 h98.43 r90
  text "GND" at 125,1192.91 h47.24 r290
  text "TX1" at 1393.8,1150.59 h47.24 r30
  text "GND" at 297.4,1130.93 h47.24
  text "RST" at 125,1078.74 h47.24 r290
  text "RX1" at 1391.4,1050.2 h47.24 r30
  text "TX1" at 297.4,1031.5 h47.24
  text "DIO" at 125,969.49 h47.24 r290
  text "RX1" at 297.4,931.1 h47.24
  text "CLK" at 125,882.87 h47.24 r290
  text "3V3" at 1387.8,877.95 h47.24 r30
  text "3V3" at 297.4,831.69 h47.24
  text "GND" at 1372.05,805.12 h47.24 r30
  text "3V3" at 125,777.56 h47.24 r290
  text "dida" at 1382.87,729.33 h47.24 r30
  text "SWD" at 27.56,657.48 h45.28
  text "SIG" at 1337.6,539.37 h47.24
  text "GND" at 1313.98,489.17 h47.24
  text "G" at 1402.56,387.8 h47.24
  text "T" at 1402.56,323.82 h47.24
  text "BOOT0" at 381.89,280.51 h47.24
  text "work" at 735.59,188.98 h47.24
  text "R" at 1401.57,166.34 h47.24
  text "IR" at 646.06,143.81 h47.24 r90
  text "power" at 711.61,90.55 h47.24
  text "V" at 1403.54,79.72 h47.24
Bottom Overlay:
  lines w7.87: 1067.32,1479.27 1326.38,1479.27 ; 1210.63,1479.27 1210.63,1883.86 ; 1326.38,1383.86 1326.38,1883.86 ; 1326.38,1383.86 1526.38,1383.86 1526.38,1883.86 1326.38,1883.86 ; 1326.38,1383.86 1067.32,1383.86 1067.32,1883.86 1326.38,1883.86 ; 702.62,1123.41 1381.75,1123.41 1381.75,1240.53 702.62,1240.53 702.62,1123.41
  text "GND" at 1197.83,1804.77 h59.06
  text "D2" at 1317.59,1804.13 h59.06
  text "BLA" at 1197.83,1704.72 h59.06
  text "DIN" at 1317.59,1704.72 h59.06
  text "VCC" at 1197.78,1605.32 h59.06
  text "CLK" at 1317.59,1605.32 h59.06
  text "LOA" at 1317.59,1503.94 h59.06
  text "VH" at 1197.78,1503.3 h59.06
  text "GND" at 1272.64,1401.57 h78.74
  text "IV-18_V7_20181023" at 1365.02,1159.82 h78.74
  text "Auto_T" at 1441.93,649.61 h59.06 r90
  text "GND" at 1464.57,377.95 h47.24 r330
  text "TX1" at 1446.47,280.51 h47.24 r330
  text "RX1" at 1448.54,180.12 h47.24 r330
  text "IR" at 628.94,146.67 h47.24 r300
  text "3V3" at 428.15,134.86 h47.24 r300
  text "GND" at 528.54,130.92 h47.24 r300
  text "3V3" at 1449.08,82.68 h47.24 r330
Top Solder:
  rectangle: 362.2,1244.09 484.25,1381.89

## Text inside footprints (layer, text, board x,y; h text height)
D6: Top Overlay "+" at 1065,1685.55 h19.68 r180